# EAGLE board EEZ DIB DCP505 r1B3 (EAGLE 7.2.0), part 1 of 2
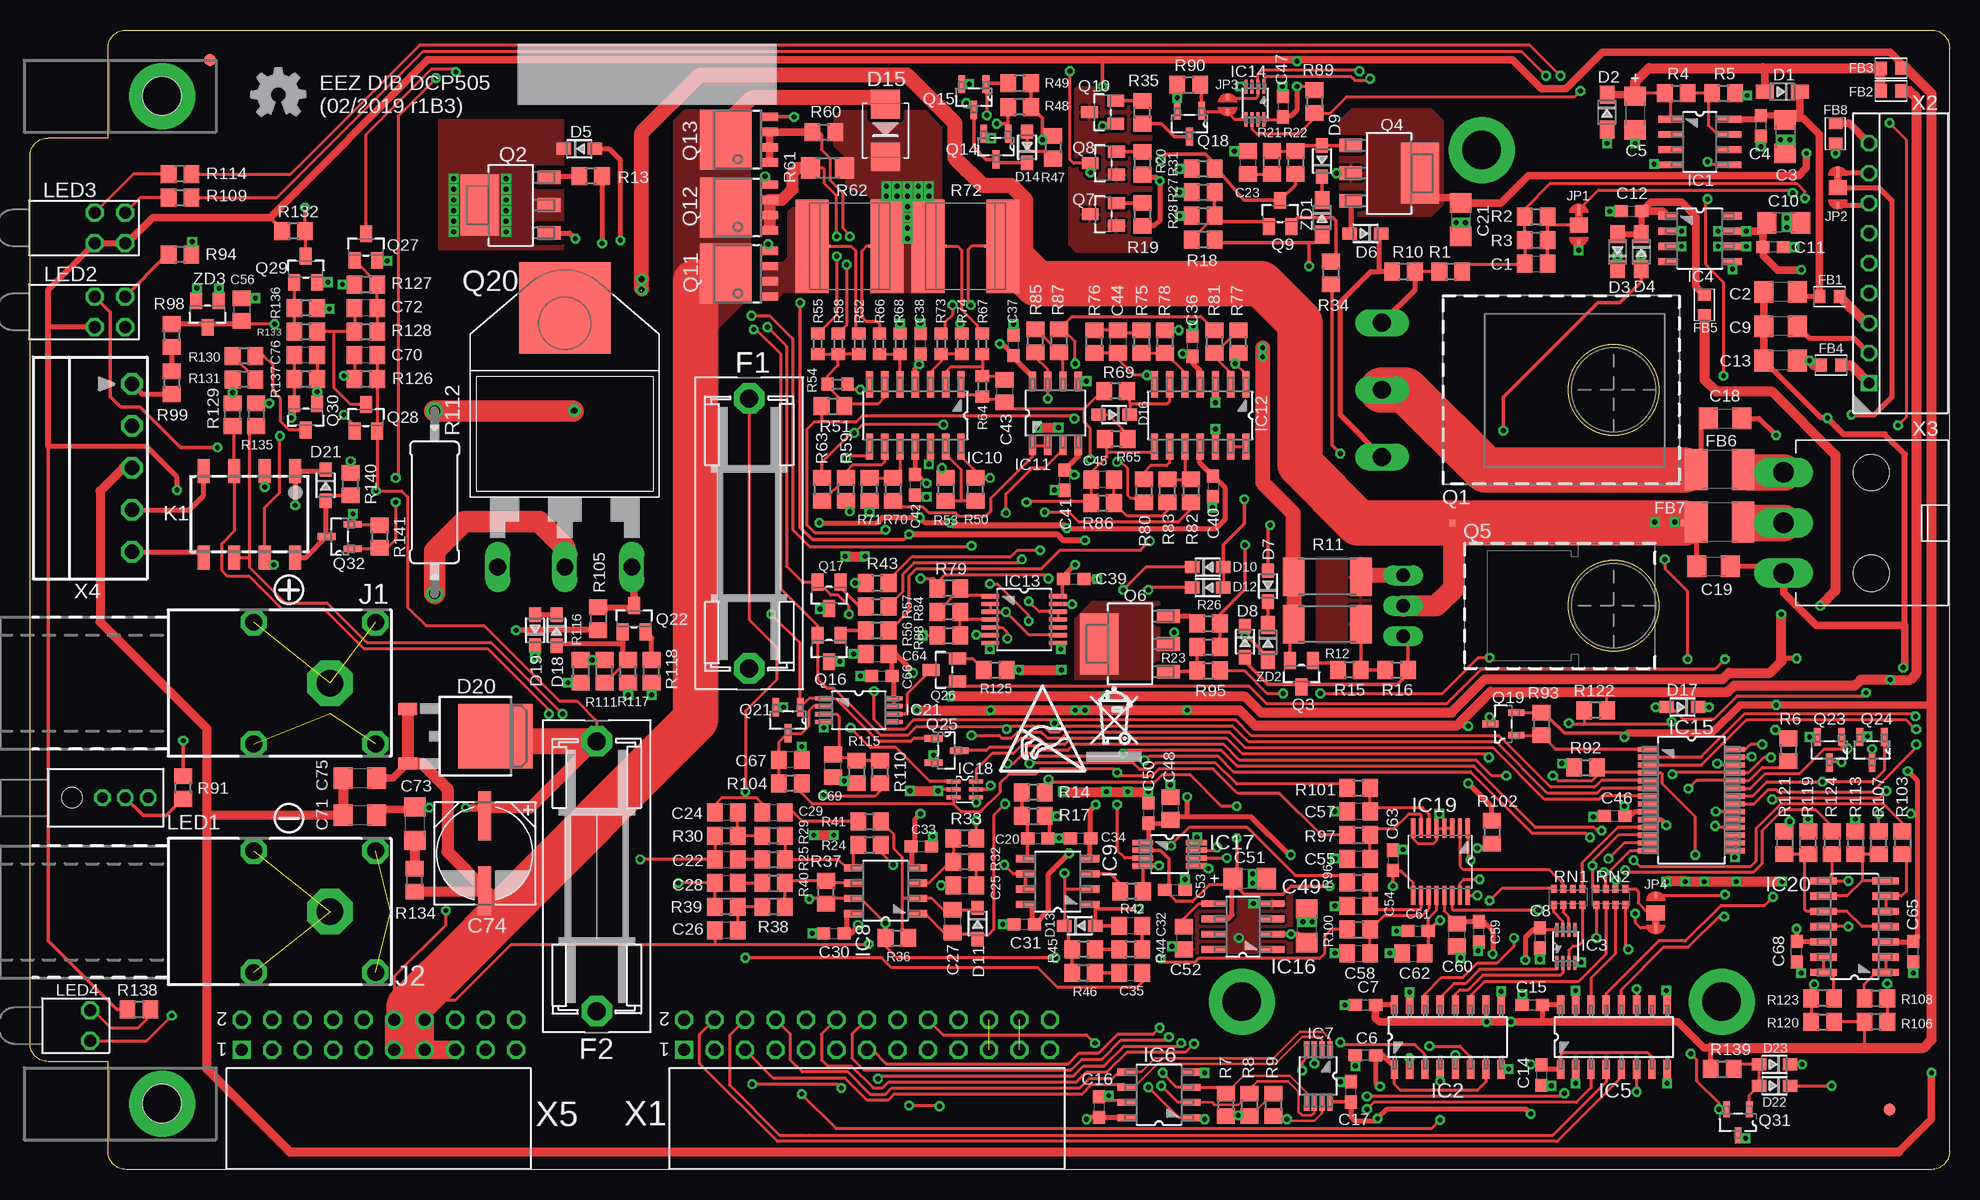
[diagram p0: board, top side]
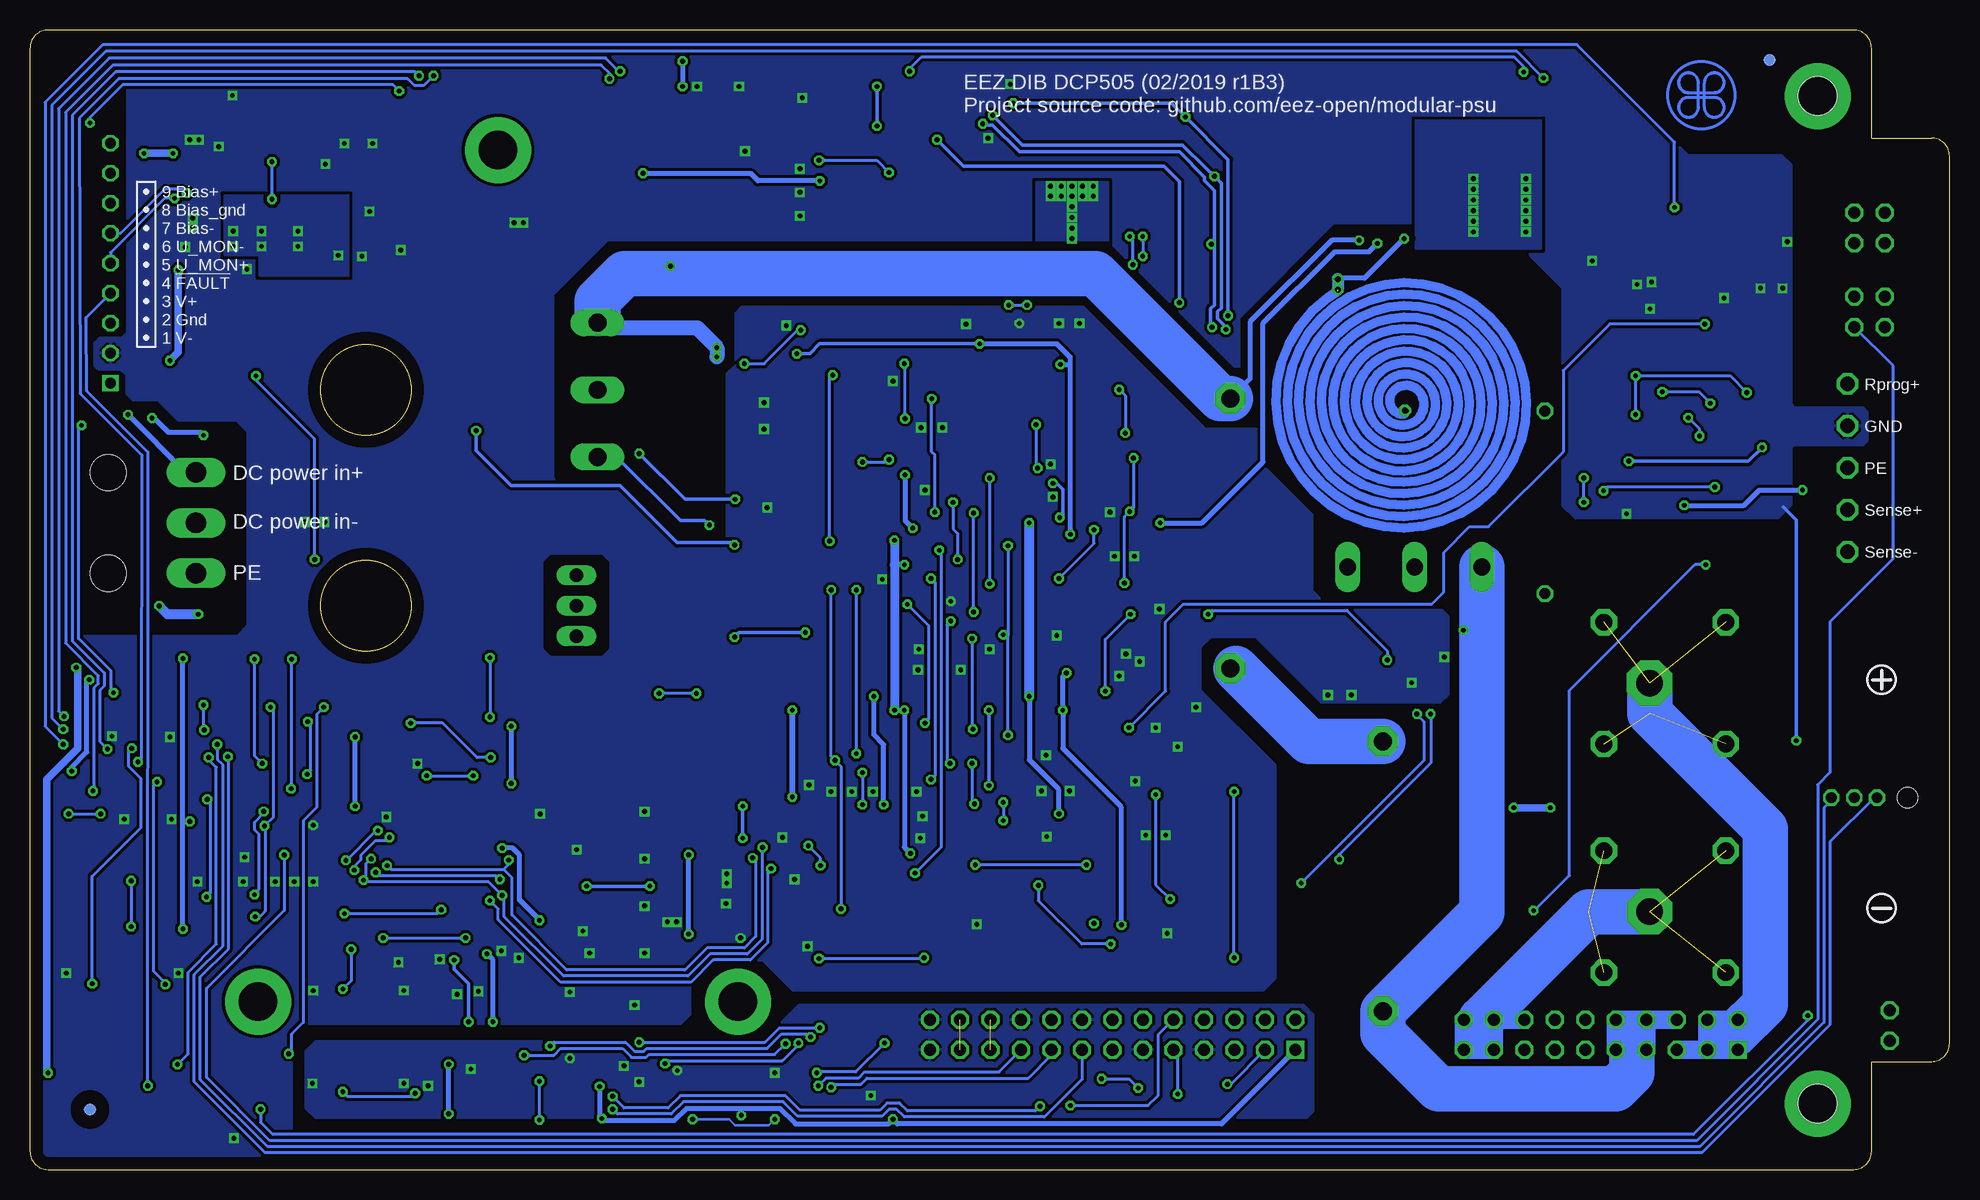
[diagram p1: board, bottom side, seen from below]

Size 160 x 95 mm. Coordinates in mm from the lower left corner, seen from the top.
Outline: 8,95 158.5,95 arc-90 160,93.5 160,1.5 arc-90 158.5,0 8,0 arc-90 6.5,1.5 6.5,9 1.5,9 arc-90 0,10.5 0,84.5 arc-90 1.5,86 6.5,86 6.5,93.5 arc-90 8,95
Outline: circle at 132,47 radius 3.75
Outline: circle at 132,65 radius 3.75
Copper layers (1*16): Top 0.035mm / dielectric 1.5mm / Bottom 0.035mm
Design rules "default *": minimum track width 6mil, minimum drill 0.3mm, track to track 6mil, track to pad 6mil, pad to pad 6mil, via to via 6mil, smd to smd 6mil, copper to edge 40mil, drill to drill 8mil, minimum pad ring 4mil, minimum via ring 8mil, stop-mask expansion 2.5mil, vias tented up to drill 1mm, thermal gap 8mil
Net classes: 0 default: width 0.203 mm, drill 0.3 mm, clearance 0.203 mm; 1 lvds: width 0.152 mm, drill 0.3 mm, clearance 0.152 mm to class 0, clearance 0.152 mm; 2 gnd: width 0.254 mm, drill 0.584 mm, clearance 0.254 mm

## Footprints (pad centres in the part's own frame; a part is rotated, then mirrored left to right if it is on the bottom)
C0805 = smd 1.3 x 1.5: 1 -0.95,0; 2 0.95,0
C1206 = smd 1.6 x 1.8: 1 -1.4,0; 2 1.4,0
C0603 = smd 1.1 x 1: 1 -0.85,0; 2 0.85,0
EC1206 = smd 1.6 x 1.8: + -1.4,0; - 1.4,0
CAPAE830X1050N = smd 4.064 x 1.092: + -3.124,0; - 3.124,0
SOD323-W = smd 1.5 x 1.2: A 1.45,0; C -1.45,0
SOD323-R = smd 1.2 x 1: A 1.3,0; C -1.3,0
SMB = smd 2.4 x 2.4: A 2.2,0; C -2.2,0
TO252-L = smd 1 x 1.6: 1 -2.28,-6.07; 2 2.28,-6.07 | smd 5.4 x 6.2: 3 0,1.23
ZH32 = drill 1.5 pad 2.54 octagon: 1 -11.25,0; 2 11.25,0
BEAD0603 = smd 1 x 1.1: P$1 -0.85,0; P$2 0.85,0
L1812 = smd 1.9 x 3.4: 1 -1.95,0; 2 1.95,0
FIDUCIAL_DUAL = smd 1.016 x 1.016 bottom: B 0,0 | smd 1.016 x 1.016: T 0,0
SOIC127P600X175-8N = smd 1.981 x 0.559: 1 -2.464,1.905; 2 -2.464,0.635; 3 -2.464,-0.635; 4 -2.464,-1.905; 5 2.464,-1.905; 6 2.464,-0.635; 7 2.464,0.635; 8 2.464,1.905
SOIC-16 = smd 1.549 x 0.61: 1 -2.692,4.445; 2 -2.692,3.175; 3 -2.692,1.905; 4 -2.692,0.635; 5 -2.692,-0.635; 6 -2.692,-1.905; 7 -2.692,-3.175; 8 -2.692,-4.445; 9 2.692,-4.445; 10 2.692,-3.175; 11 2.692,-1.905; 12 2.692,-0.635; 13 2.692,0.635; 14 2.692,1.905; 15 2.692,3.175; 16 2.692,4.445
DCU8 = smd 1.168 x 0.254: 1 -1.372,0.75; 2 -1.372,0.25; 3 -1.372,-0.25; 4 -1.372,-0.75; 5 1.372,-0.75; 6 1.372,-0.25; 7 1.372,0.25; 8 1.372,0.75
SOIC127P600X173-8N = smd 1.55 x 0.6: 1 -2.7,1.9; 2 -2.7,0.63; 3 -2.7,-0.64; 4 -2.7,-1.91; 5 2.7,-1.91; 6 2.7,-0.64; 7 2.7,0.63; 8 2.7,1.9
DGK8 = smd 1.422 x 0.432: 1 -2.184,0.965; 2 -2.184,0.33; 3 -2.184,-0.33; 4 -2.184,-0.965; 5 2.184,-0.965; 6 2.184,-0.33; 7 2.184,0.33; 8 2.184,0.965
SOIC127P600X175-14N = smd 2.2 x 0.6: 1 -2.591,3.81; 2 -2.591,2.54; 3 -2.591,1.27; 4 -2.591,0; 5 -2.591,-1.27; 6 -2.591,-2.54; 7 -2.591,-3.81; 8 2.591,-3.81; 9 2.591,-2.54; 10 2.591,-1.27; 11 2.591,0; 12 2.591,1.27; 13 2.591,2.54; 14 2.591,3.81
SOP65P640X120-14N = smd 1.473 x 0.356: 1 -2.819,1.956; 2 -2.819,1.295; 3 -2.819,0.66; 4 -2.819,0; 5 -2.819,-0.66; 6 -2.819,-1.295; 7 -2.819,-1.956; 8 2.819,-1.956; 9 2.819,-1.295; 10 2.819,-0.66; 11 2.819,0; 12 2.819,0.66; 13 2.819,1.295; 14 2.819,1.956
SOP65P780X200-28N = smd 1.651 x 0.432: 1 -3.632,4.216; 2 -3.632,3.581; 3 -3.632,2.921; 4 -3.632,2.286; 5 -3.632,1.626; 6 -3.632,0.965; 7 -3.632,0.33; 8 -3.632,-0.33; 9 -3.632,-0.965; 10 -3.632,-1.626; 11 -3.632,-2.286; 12 -3.632,-2.921; 13 -3.632,-3.581; 14 -3.632,-4.216; 15 3.632,-4.216; 16 3.632,-3.581; 17 3.632,-2.921; 18 3.632,-2.286; 19 3.632,-1.626; 20 3.632,-0.965; 21 3.632,-0.33; 22 3.632,0.33; 23 3.632,0.965; 24 3.632,1.626; 25 3.632,2.286; 26 3.632,2.921; 27 3.632,3.581; 28 3.632,4.216
DGK8-M = smd 1.727 x 0.483: 1 -2.235,0.965; 2 -2.235,0.33; 3 -2.235,-0.33; 4 -2.235,-0.965; 5 2.235,-0.965; 6 2.235,-0.33; 7 2.235,0.33; 8 2.235,0.965
SOT65P210X110-6N = smd 1.168 x 0.356: 1 -0.94,0.66; 2 -0.94,0; 3 -0.94,-0.66; 4 0.94,-0.66; 5 0.94,0; 6 0.94,0.66
PW(R-PDSO-G16) = smd 1.6 x 0.35: 1 -2.8,2.3; 2 -2.8,1.65; 3 -2.8,1; 4 -2.8,0.35; 5 -2.8,-0.3; 6 -2.8,-0.95; 7 -2.8,-1.6; 8 -2.8,-2.25; 9 2.8,-2.25; 10 2.8,-1.6; 11 2.8,-0.95; 12 2.8,-0.3; 13 2.8,0.35; 14 2.8,1; 15 2.8,1.65; 16 2.8,2.3
PW8_TSSOP8 = smd 1.473 x 0.356: 1 -2.921,0.975; 2 -2.921,0.325; 3 -2.921,-0.325; 4 -2.921,-0.975; 5 2.921,-0.975; 6 2.921,-0.325; 7 2.921,0.325; 8 2.921,0.975
S16N-PC = drill 2.2 pad 3.81 octagon: 1 0,0 | drill 1.4 pad 2.184 octagon: NC1 -3.8,5.08; NC2 -3.8,-5.08; NC3 6.36,5.08; NC4 6.36,-5.08
JP3-CUT = smd 1.27 x 1.524: COM 0,0 | smd 0.889 x 0.254: NC -1.27,0 | smd 0.508 x 0.254: NO 1.46,0
JP2-CUT = smd 0.508 x 0.254: 1 -0.635,0; 2 0.635,0
G6K-2F = smd 1 x 2: 1 -3.81,-3.6; 2 -1.27,-3.6; 3 1.27,-3.6; 4 3.81,-3.6; 5 3.81,3.6; 6 1.27,3.6; 7 -1.27,3.6; 8 -3.81,3.6
PCB-MB = hole 3.2: 0,0
L-42WUM-1EGWT = drill 0.9 octagon: CC 4.445,0; GREEN 6.35,0; RED 2.54,0 | hole 1.7: 0,0
L-934EB = drill 1 octagon: BA -1.27,-1.27; BC -1.27,1.27; TA 1.27,-1.27; TC 1.27,1.27
OSG8 = drill 1 octagon: A 0,1.27; C 0,-1.27
TO247BH-CLR2 = drill 1.499 long: 1 -5.588,-19.304; 2 0,-19.304; 3 5.588,-19.304
SOT230P700X180-4N = smd 1.905 x 1.143: 1 -3.2,2.311; 2 -3.2,0; 3 -3.2,-2.311 | smd 3.175 x 5.08: 4 2.565,0
SOT23-BEC = smd 1 x 1.4: B -0.95,-1.1; C 0,1.1; E 0.95,-1.1
TO220H-CLR2 = drill 1.118 long: 1 -2.54,-17.526; 2 0,-17.526; 3 2.54,-17.526
SOT669 = smd 0.7 x 1.4: 1 -1.905,-2.65; 2 -0.635,-2.65; 3 0.635,-2.65; 4 1.905,-2.65 | smd 5 x 4.3: MB 0,1
SOT103P240X110-3N = smd 1.524 x 0.559: 1 -1.079,1.016; 2 -1.079,-1.016; 3 1.079,0
SOT95P237X112-3N = smd 1.321 x 0.559: 1 -1.092,0.94; 2 -1.092,-0.94; 3 1.092,0
TOP3_TRIAC_NOHOLE = drill 1.397 long: A1 -5.588,-20.32; A2 0,-20.32; G 5.588,-20.32 | smd 7.62 x 7.62: NC 0,1.27
R0805 = smd 1.3 x 1.5: 1 -0.95,0; 2 0.95,0
R2512 = smd 1.8 x 3.2: 1 -2.8,0; 2 2.8,0
R0603 = smd 1 x 1.1: 1 -0.85,0; 2 0.85,0
R1206 = smd 1.6 x 1.803: 1 -1.422,0; 2 1.422,0
R_H2728 = smd 2.743 x 7.823: 1 -3.124,0; 2 3.124,0 | smd 0.508 x 0.254: 1S -1.841,0; 2S 1.841,0
0411/15 = drill 0.914 octagon: 1 -7.62,0; 2 7.62,0
CAY16 = smd 0.5 x 0.65: 1 -1.2,-0.675; 2 -0.4,-0.675; 3 0.4,-0.675; 4 1.2,-0.675; 5 1.2,0.675; 6 0.4,0.675; 7 -0.4,0.675; 8 -1.2,0.675
SHORT_NOHOLE = smd 0.5 x 0.25 bottom: P$1 0,0.117; P$2 0,-0.117
SSW-113-02-T-D-RA = drill 1 pad 1.5 square: 1 30.48,2.54 | drill 1 pad 1.5 octagon: 2 30.48,0; 3 27.94,2.54; 4 27.94,0; 5 25.4,2.54; 6 25.4,0; 7 22.86,2.54; 8 22.86,0; 9 20.32,2.54; 10 20.32,0; 11 17.78,2.54; 12 17.78,0; 13 15.24,2.54; 14 15.24,0; 15 12.7,2.54; 16 12.7,0; 17 10.16,2.54; 18 10.16,0; 19 7.62,2.54; 20 7.62,0; 21 5.08,2.54; 22 5.08,0; 23 2.54,2.54; 24 2.54,0; 25 0,2.54; 26 0,0
SPOX_22-05-7095 = drill 0.9 square: 1 -10,0 | drill 0.9 octagon: 2 -7.5,0; 3 -5,0; 4 -2.5,0; 5 0,0; 6 2.5,0; 7 5,0; 8 7.5,0; 9 10,0
MINIFIT_6659-3 = drill 1.7 long: 1 0,-4.2; 2 0,0; 3 0,4.2 | hole 3: -7.3,4.2; -7.3,-4.2
MC1,5/5-G-3,5 = drill 1.2 octagon: 1 -7,0; 2 -3.5,0; 3 0,0; 4 3.5,0; 5 7,0
SSW-110-02-T-D-RA = drill 1 pad 1.5 square: 1 22.86,2.54 | drill 1 pad 1.5 octagon: 2 22.86,0; 3 20.32,2.54; 4 20.32,0; 5 17.78,2.54; 6 17.78,0; 7 15.24,2.54; 8 15.24,0; 9 12.7,2.54; 10 12.7,0; 11 10.16,2.54; 12 10.16,0; 13 7.62,2.54; 14 7.62,0; 15 5.08,2.54; 16 5.08,0; 17 2.54,2.54; 18 2.54,0; 19 0,2.54; 20 0,0
SOT23 = smd 1 x 1.4: 1 -0.95,-1.1; 2 0.95,-1.1; 3 0,1.1

## Placement (x,y rotation side)
C1  47n  [C0805]  125.54,75.5 0 top
C2  47n  [C1206]  145.92,73.15 180 top
C3  10u  [C1206]  146.3,86.11 270 top
C4  100n  [C0603]  144.27,87 270 top
C5  4u7  [EC1206]  133.79,88.07 270 top
C6  100n  [C0603]  111.32,9.53 180 top
C7  100n  [C0603]  111.32,13.72 0 top
C8  100n  [C0603]  125.86,19.3 270 top
C9  47n  [C1206]  145.92,70.29 180 top
C10  10u  [C1206]  146.18,78.93 180 top
C11  100n  [C0603]  145.29,76.9 180 top
C12  100n  [C0603]  133.48,79.88 0 top
C13  47n  [C1206]  145.92,67.44 180 top
C14  100n  [C0603]  125.98,7.87 270 top
C15  100n  [C0603]  125.22,13.72 0 top
C16  100n  [C0603]  89.09,5.21 270 top
C17  100n  [C0603]  110.11,6.48 90 top
C18  47n  [C1206]  141.29,62.61 0 top
C19  47n  [C1206]  140.34,50.29 0 top
C20  100n  [C0603]  84.01,27.62 0 top
C21  1u/100V  [C1206]  119.25,79.18 270 top
C22  47p  [C0805]  58.04,25.84 0 top
C23  10n  [C0805]  101.54,83.95 90 top
C24  2n2  [C0805]  58.04,29.78 180 top
C25  2n2  [C0805]  77.91,23.69 0 top
C26  2n2  [C0805]  58.04,19.94 180 top
C27  220p  [C0805]  76.9,20.7 270 top
C28  47p  [C0805]  58.04,23.88 0 top
C29  2n2  [C0805]  61.98,29.78 0 top
C30  100n  [C0603]  66.99,19.68 0 top
C31  100n  [C0603]  82.87,20.45 0 top
C32  1n  [C0805]  91.76,20.32 180 top
C33  100n  [C0603]  74.3,26.92 180 top
C34  100n  [C0603]  87.57,27.62 0 top
C35  1n  [C0805]  91.76,16.38 180 top
C36  100n  [C0603]  96.9,68.64 90 top
C37  100n  [C0603]  81.98,68.71 90 top
C38  100n  [C0603]  74.23,68.83 90 top
C39  100n  [C0603]  87,49.21 180 top
C40  100n  [C0603]  98.62,56.96 270 top
C41  100n  [C0603]  86.23,57.47 270 top
C42  100n  [C0603]  73.79,57.09 270 top
C43  47n  [C0805]  81.22,64.9 270 top
C44  10n  [C0805]  90.68,69.02 270 top
C45  10n  [C0805]  89.41,57.53 180 top
C46  100n  [C0603]  132.08,29.46 180 top
C47  100n  [C0603]  104.42,88.61 270 top
C48  1u  [C0805]  95.06,30.1 90 top
C49  10u  [C1206]  106.43,20.32 90 top
C50  100n  [C0603]  93.22,29.72 270 top
C51  4u7  [EC1206]  101.66,24.26 0 top
C52  1u  [C0805]  96.2,19.3 270 top
C53  100n  [C0603]  95.44,23.3 180 top
C54  3n3  [C0805]  110.74,21.97 0 top
C55  3n3  [C0805]  110.74,25.91 0 top
C56  10n  [C0805]  17.65,71.69 270 top
C57  3n3  [C0805]  110.74,29.84 180 top
C58  3n3  [C0805]  110.74,18.03 0 top
C59  100n  [C0603]  120.78,19.81 90 top
C60  1u  [C0805]  118.94,19.56 90 top
C61  100n  [C0603]  115.7,19.88 0 top
C62  1u  [C0805]  115.32,18.03 0 top
C63  100n  [C0603]  113.6,25.78 270 top
C64  1u  [C0805]  70.61,42.99 180 top
C65  100n  [C0603]  156.97,18.16 90 top
C66  100n  [C0603]  70.99,41.15 0 top
C67  1n  [C0805]  63.37,34.16 180 top
C68  100n  [C0603]  147.26,18.16 90 top
C69  1n  [C0805]  66.93,33.66 90 top
C70  10n  [C0805]  28,67.88 180 top
C71  10n/200V  [C1206]  27.5,29.53 180 top
C72  2n2  [C0805]  28,71.82 180 top
C73  470n  [C1206]  32.07,28.83 270 top
C74  HHXC630ARA330MHA0G  [CAPAE830X1050N]  37.91,26.35 270 top
C75  10n/200V  [C1206]  27.5,32.64 0 top
C76  10n  [C0805]  22.99,67.88 180 top
D1  1N5819HW-7-F  [SOD323-W]  146.05,89.85 180 top
D2  1N5819HW-7-F  [SOD323-W]  131.44,88.14 270 top
D3  1N5819HW-7-F  [SOD323-W]  132.33,76.52 90 top
D4  1N5819HW-7-F  [SOD323-W]  134.3,76.52 270 top
D5  BAS316  [SOD323-R]  45.78,85.09 0 top
D6  BAS316  [SOD323-R]  111.32,78.04 180 top
D7  BAS316  [SOD323-R]  103.19,48.64 90 top
D8  BAS316  [SOD323-R]  101.28,44.01 270 top
D9  BAS316  [SOD323-R]  107.7,84.07 90 top
D10  BAS316  [SOD323-R]  98.17,50.23 0 top
D11  BAS316  [SOD323-R]  78.99,20.51 270 top
D12  BAS316  [SOD323-R]  98.17,48.51 0 top
D13  BAS316  [SOD323-R]  87.5,20.32 0 top
D14  BAS316  [SOD323-R]  83.12,85.22 90 top
D15  SK55  [SMB]  71.31,86.61 90 top
D16  BAS316  [SOD323-R]  90.36,62.93 180 top
D17  BAS316  [SOD323-R]  137.73,38.54 180 top
D18  BAS316  [SOD323-R]  43.88,44.96 270 top
D19  BAS316  [SOD323-R]  42.1,44.96 90 top
D20  SK10100D1-DIO  [TO252-L]  37.56,36.13 270 top
D21  BAS316  [SOD323-R]  24.64,57.05 270 top
D22  BAS316  [SOD323-R]  145.41,6.99 180 top
D23  BAS316  [SOD323-R]  145.41,8.76 180 top
EEZ_SIGNATURE  SIGNATURESMALL  [SIGNATURE_5MM]  20.68,89.58 180 top
F1  ZH32  [ZH32]  59.94,53.02 270 top
F2  ZH32  [ZH32]  47.24,24.45 270 top
FB1  BLM18AG102SH1D  [BEAD0603]  149.99,72.77 180 top
FB2  BLM18AG102SH1D  [BEAD0603]  155.13,89.92 0 top
FB3  BLM18AG102SH1D  [BEAD0603]  155.13,91.82 0 top
FB4  BLM18AG102SH1D  [BEAD0603]  150.11,67.06 180 top
FB5  BLM18AG102SH1D  [BEAD0603]  139.57,72.07 270 top
FB6  BLM41PG600SN1L  [L1812]  140.84,58.36 180 top
FB7  BLM41PG600SN1L  [L1812]  140.84,53.98 180 top
FB8  BLM18AG102SH1D  [BEAD0603]  150.5,86.36 270 top
FM1  FIDUCIAL_2  [FIDUCIAL_DUAL]  15,92.5 0 top
FM2  FIDUCIAL_2  [FIDUCIAL_DUAL]  155,5 0 top
IC1  LP2951  [SOIC127P600X175-8N]  139.19,85.66 0 top
IC2  SI8641BB-B-IS1  [SOIC-16]  118.17,11.05 90 top
IC3  SN74LVC1G139DCUR  [DCU8]  128.02,18.61 90 top
IC4  MC79L05  [SOIC127P600X173-8N]  139.19,77.6 0 top
IC5  SI8641BB-B-IS1  [SOIC-16]  132.02,11.05 90 top
IC6  AT24C04D-SSHM-T  [SOIC127P600X173-8N]  94.11,6.22 180 top
IC7  TMP1075AIDGK  [DGK8]  107.38,7.81 270 top
IC8  MC33272ADR2G  [SOIC127P600X173-8N]  71.31,23.24 180 top
IC9  MC33274ADR2G  [SOIC127P600X173-8N]  85.66,24 180 top
IC10  OPA4197IDR  [SOIC127P600X175-14N]  73.79,62.87 270 top
IC11  MC33272ADR2G  [SOIC127P600X173-8N]  85.47,63.06 90 top
IC12  MC33274ADR2G  [SOIC127P600X175-14N]  97.54,62.87 270 top
IC13  74HC4066PW  [SOP65P640X120-14N]  82.87,45.85 0 top
IC14  74AUP1G74DC.125  [DCU8]  102.12,88.91 270 top
IC15  MCP23S17-E/SS  [SOP65P780X200-28N]  138.49,30.8 0 top
IC16  REF5025AIDR  [SOIC127P600X175-8N]  101.09,20.26 180 top
IC17  DAC8552IDGKR  [DGK8-M]  95,26.29 0 top
IC18  SN74LVC1G3157DCKR  [SOT65P210X110-6N]  77.91,31.69 0 top
IC19  ADS1120IPWR  [PW(R-PDSO-G16)]  117.54,25.65 270 top
IC20  LM339D  [SOIC127P600X175-14N]  152.08,20.26 180 top
IC21  LM211PWR  [PW8_TSSOP8]  69.09,38.29 0 top
J1  FCR7350R  [S16N-PC]  25,40.55 180 top
J2  FCR7350B  [S16N-PC]  25,21.5 180 top
JP1  JP3-CUT  [JP3-CUT]  129.1,78.74 270 top
JP2  JP3-CUT  [JP3-CUT]  150.69,81.85 270 top
JP3  JP2-CUT  [JP2-CUT]  99.82,88.77 270 top
JP4  JP3-CUT  [JP3-CUT]  135.51,21.4 90 top
K1  G6K-2F-5DC  [G6K-2F]  18.29,54.64 180 top
KK1  PCB-MB  [PCB-MB]  11,89.5 0 top
KK2  PCB-MB  [PCB-MB]  11,5.5 0 top
LED1  L-42WUM/1EGWT  [L-42WUM-1EGWT]  3.5,31 0 top
LED2  L-934EB/2ID  [L-934EB]  6.65,71.5 0 top
LED3  L-934EB/1Y1ID-RV  [L-934EB]  6.65,78.5 0 top
LED4  OSY5LU3E34X-3F1A  [OSG8]  5,12 0 top
Q1  IRFP250MPBF  [TO247BH-CLR2]  132,65 90 bottom
Q2  BCP56-16.115  [SOT230P700X180-4N]  40.07,80.39 180 top
Q3  BC856C  [SOT23-BEC]  105.98,41.34 180 top
Q4  BCP56-16.115  [SOT230P700X180-4N]  113.28,83.06 0 top
Q5  STF10P6F6  [TO220H-CLR2]  132,47 90 bottom
Q6  BCP56-16.115  [SOT230P700X180-4N]  91.69,43.81 180 top
Q7  MMBT5401  [SOT23-BEC]  89.47,79.63 90 top
Q8  MMBT5401  [SOT23-BEC]  89.47,83.88 90 top
Q9  MMBT5551  [SOT23-BEC]  104.2,79.69 0 top
Q10  MMBT5551  [SOT23-BEC]  89.41,88.14 90 top
Q11  PSMN0R9-25YLC  [SOT669]  58.99,74.68 90 top
Q12  PSMN0R9-25YLC  [SOT669]  58.99,80.2 90 top
Q13  PSMN0R9-25YLC  [SOT669]  58.99,85.85 90 top
Q14  2N7002  [SOT103P240X110-3N]  80.52,85.28 270 top
Q15  2N7002  [SOT103P240X110-3N]  78.68,89.41 270 top
Q16  MMBT5401  [SOT23-BEC]  66.61,43.43 180 top
Q17  MMBT5401  [SOT23-BEC]  66.61,47.88 180 top
Q18  2N7002  [SOT103P240X110-3N]  96.65,87.19 270 top
Q19  BSS84P  [SOT95P237X112-3N]  122.81,37.15 180 top
Q20  BTA26-600  [TOP3_TRIAC_NOHOLE]  44.58,70.55 0 top
Q21  2N7002  [SOT103P240X110-3N]  63.18,37.47 270 top
Q22  FMMT493TA  [SOT23-BEC]  50.36,45.91 0 top
Q23  2N7002  [SOT103P240X110-3N]  149.99,34.99 270 top
Q24  2N7002  [SOT103P240X110-3N]  153.54,34.99 270 top
Q25  2N7002  [SOT103P240X110-3N]  76.39,34.92 0 top
Q26  MMBT5551  [SOT23-BEC]  76.2,41.66 90 top
Q27  MMBT5551  [SOT23-BEC]  28,76.9 0 top
Q28  MMBT5401  [SOT23-BEC]  28,62.67 0 top
Q29  MMBT5551  [SOT23-BEC]  22.99,75.06 0 top
Q30  MMBT5551  [SOT23-BEC]  22.99,62.74 180 top
Q31  BSS84P  [SOT95P237X112-3N]  142.37,3.94 270 top
Q32  2N7002  [SOT103P240X110-3N]  25.81,52.77 180 top
R1  100K  [R0805]  118.43,74.87 0 top
R2  5K6  [R0805]  125.54,79.44 0 top
R3  86K6  [R0805]  125.54,77.47 0 top
R4  16K  [R0805]  137.22,89.73 0 top
R5  5K1  [R0805]  141.16,89.73 0 top
R6  10K  [R0805]  146.56,34.99 270 top
R7  10K  [R0805]  99.69,5.4 90 top
R8  10K  [R0805]  101.66,5.4 90 top
R9  10K  [R0805]  103.63,5.4 270 top
R10  1K  [R0805]  114.49,74.87 0 top
R11  3R9/2W  [R2512]  108.14,49.41 180 top
R12  3R9/2W  [R2512]  108.14,45.47 180 top
R13  750R  [R0805]  46.74,82.8 180 top
R14  10K  [R0805]  83.63,31.43 180 top
R15  2K2  [R0805]  109.98,41.66 180 top
R16  2K2  [R0805]  113.92,41.66 0 top
R17  220R  [R0805]  83.63,29.46 0 top
R18  16K  [R0805]  97.79,77.53 0 top
R19  220R  [R0805]  92.71,79.63 270 top
R20  220R  [R0805]  92.71,83.88 270 top
R21  470R  [R0805]  103.5,83.95 90 top
R22  100R  [R0805]  105.47,83.95 270 top
R23  1K  [R0805]  98.23,43.56 0 top
R24  7K5 0.1%  [R0805]  69.98,27.05 180 top
R25  10K  [R0805]  61.98,25.84 0 top
R26  220R  [R0805]  98.23,45.53 0 top
R27  2K2  [R0805]  97.79,81.47 0 top
R28  750R  [R0805]  97.79,79.5 0 top
R29  130K 0.1%  [R0805]  61.98,27.81 180 top
R30  24K 0.1%  [R0805]  58.04,27.81 180 top
R31  51K  [R0805]  97.79,83.44 0 top
R32  220R  [R0805]  77.91,25.65 180 top
R33  10K  [R0805]  77.91,27.62 180 top
R34  470R  [R0805]  108.46,74.74 90 top
R35  1K8  [R0805]  92.71,88.14 90 top
R36  10K  [R0805]  72.26,19.3 0 top
R37  7K5 0.1%  [R0805]  66.36,23.11 90 top
R38  130K 0.1%  [R0805]  61.98,21.91 180 top
R39  24K 0.1%  [R0805]  58.04,21.91 180 top
R40  10K  [R0805]  61.98,23.88 0 top
R41  220R  [R0805]  69.98,29.02 0 top
R42  2K2  [R0805]  91.82,23.18 180 top
R43  10K  [R0805]  70.61,48.9 0 top
R44  1K  [R0805]  91.76,18.35 180 top
R45  10K  [R0805]  87.82,18.35 180 top
R46  10K  [R0805]  87.82,16.38 180 top
R47  1K  [R0805]  85.28,85.22 270 top
R48  1K  [R0805]  82.49,88.58 180 top
R49  1K  [R0805]  82.49,90.55 180 top
R50  30K  [R0805]  78.8,56.71 90 top
R51  7M5  [R0805]  66.93,63.63 0 top
R52  3K 0.1%  [R0603]  69.09,68.83 270 top
R53  10K  [R0805]  76.33,56.71 270 top
R54  40K2 0.1%  [R0603]  67.31,65.47 0 top
R55  3K 0.1%  [R0603]  65.66,68.83 270 top
R56  2K2  [R0805]  70.61,44.96 0 top
R57  2K2  [R0805]  70.61,46.93 0 top
R58  3K 0.1%  [R0603]  67.37,68.83 270 top
R59  10K  [R0805]  68.01,56.71 270 top
R60  1R  [R0805]  66.17,86.49 0 top
R61  0R1  [R1206]  66.48,83.5 180 top
R62  0R010  [R_H2728]  68.33,76.96 180 top
R63  10K  [R0805]  66.04,56.71 270 top
R64  499K 0.1%  [R0603]  79.38,65.28 90 top
R65  1K  [R0805]  90.55,60.9 180 top
R66  1K 0.1%  [R0603]  70.8,68.83 270 top
R67  1K 0.1%  [R0603]  79.38,68.83 90 top
R68  40K2 0.1%  [R0603]  72.52,68.83 270 top
R69  10K  [R0805]  90.49,64.9 180 top
R70  10K  [R0805]  71.95,56.71 270 top
R71  10K  [R0805]  69.98,56.71 90 top
R72  0R010  [R_H2728]  77.98,76.96 180 top
R73  1K 0.1%  [R0603]  75.95,68.83 90 top
R74  499K 0.1%  [R0603]  77.66,68.83 90 top
R75  10K  [R0805]  92.65,69.02 270 top
R76  1M  [R0805]  88.71,69.02 90 top
R77  1K  [R0805]  100.71,69.02 90 top
R78  100R  [R0805]  94.61,69.02 90 top
R79  1K  [R0805]  76.58,48.45 180 top
R80  10K  [R0805]  92.84,56.58 270 top
R81  10K  [R0805]  98.74,69.02 90 top
R82  100R  [R0805]  96.77,56.58 270 top
R83  10K  [R0805]  94.81,56.58 90 top
R84  1K  [R0805]  76.58,46.48 180 top
R85  10K  [R0805]  83.82,69.09 90 top
R86  1M  [R0805]  89.41,55.56 0 top
R87  10K  [R0805]  85.79,69.09 90 top
R88  1K  [R0805]  76.58,44.51 0 top
R89  10K  [R0805]  107.06,89.03 270 top
R90  100K  [R0805]  96.58,90.42 0 top
R91  270R  [R0805]  12.76,31.84 90 top
R92  47K  [R0805]  129.67,33.53 0 top
R93  100K  [R0805]  125.98,37.15 270 top
R94  470R  [R0805]  12.51,76.26 180 top
R95  10K  [R0805]  98.23,41.59 0 top
R96  220R  [R0805]  110.74,23.94 0 top
R97  220R  [R0805]  110.74,27.88 0 top
R98  470R  [R0805]  11.81,69.53 270 top
R99  470R  [R0805]  11.81,65.6 270 top
R100  220R  [R0805]  110.74,20 0 top
R101  220R  [R0805]  110.74,31.81 0 top
R102  10R  [R0805]  121.86,28.13 270 top
R103  10K  [R0805]  156.08,27.24 270 top
R104  10K  [R0805]  63.37,32.19 180 top
R105  470R  [R0805]  47.37,45.91 270 top
R106  5K1  [R0805]  153.86,12.32 180 top
R107  47K  [R0805]  154.11,27.24 90 top
R108  5K6  [R0805]  153.86,14.29 0 top
R109  330R  [R0805]  12.51,81.03 0 top
R110  750R  [R0805]  70.87,33.15 90 top
R111  1K  [R0805]  47.88,41.53 90 top
R112  AC01000001007JA100  [0411/15]  33.72,55.63 270 top
R113  2K2  [R0805]  152.15,27.24 270 top
R114  330R  [R0805]  12.51,82.99 180 top
R115  10K  [R0805]  68.9,33.15 270 top
R116  10K  [R0805]  45.91,41.53 270 top
R117  100K  [R0805]  49.85,41.53 90 top
R118  6R2  [R0805]  51.82,41.53 90 top
R119  10K  [R0805]  148.21,27.24 90 top
R120  5K1  [R0805]  149.42,12.32 0 top
R121  10K  [R0805]  146.24,27.24 270 top
R122  4K7  [R0805]  130.49,38.29 180 top
R123  5K6  [R0805]  149.42,14.29 180 top
R124  10K  [R0805]  150.18,27.24 270 top
R125  1K  [R0805]  80.45,41.66 0 top
R126  330R  [R0805]  28,65.91 0 top
R127  47K  [R0805]  28,73.79 0 top
R128  47K  [R0805]  28,69.85 0 top
R129  750R  [R0805]  16.89,62.93 90 top
R130  1K  [R0805]  17.84,67.82 180 top
R131  2K2  [R0805]  17.84,65.85 180 top
R132  10K  [R0805]  21.97,78.23 180 top
R133  10K  [R0805]  22.99,69.85 0 top
R134  1R  [R0805]  32.07,24.13 90 top
R135  750R  [R0805]  18.86,62.93 270 top
R136  47K  [R0805]  22.99,71.82 180 top
R137  330R  [R0805]  22.99,65.91 0 top
R138  470R  [R0805]  9.08,13.34 180 top
R139  10K  [R0805]  141.03,8.38 0 top
R140  470R  [R0805]  26.73,57.15 90 top
R141  100K  [R0805]  29.15,52.77 270 top
RN1  DR1206-33R-4/8  [CAY16]  128.21,22.73 0 top
RN2  DR1206-33R-4/8  [CAY16]  131.76,22.73 0 top
SH1  [SHORT_NOHOLE]  118.55,53.91 90 bottom
SH2  [SHORT_NOHOLE]  137.79,53.91 90 bottom
U$1  [RECYCLE_BIN1/8]  88.08,34.04 0 top
U$6  [ESD_SYMBOL]  80.86,33.23 0 top
X1  ZL263-26DG  [SSW-113-02-T-D-RA]  85,12.5 180 top
X2  22-05-7085  [SPOX_22-05-7095]  153.29,75.56 90 top
X3  39-30-3035  [MINIFIT_6659-3]  146.18,53.91 180 top
X4  1844249  [MC1,5/5-G-3,5]  8.5,58.5 270 top
X5  ZL263-20DG  [SSW-110-02-T-D-RA]  40.5,12.5 180 top
ZD1  BZX384-C15  [SOD323-W]  107.7,79.38 270 top
ZD2  PDZ6.2B  [SOD323-W]  103.19,43.94 270 top
ZD3  SLVU2.8-TP  [SOT23]  14.8,71.31 180 top

## Library data of the parts
C1-C4 C6-C50 C52-C73 C75 C76 FB6 FB7 R1-R61 R63-R71 R73-R141 = rcl
C5 C51 C74 D5-D23 EEZ_SIGNATURE F1 F2 FM1 FM2 IC1 IC2 IC4-IC9 IC11 IC13 IC14 IC16-IC21 J1 J2 JP1-JP4 KK1 KK2 LED1-LED4 Q1 Q2 Q4-Q6 Q11-Q13 Q20 R62 R72 RN1 RN2 SH1 SH2 ZD1-ZD3 = EEZ_Lib1
D1-D4 = diode
FB1-FB5 FB8 = EEZ_inductors_and_transformers
IC3 = EEZ_DIB
IC10 IC12 = EEZ_Lib1; MPN: TL074ACD; OC_FARNELL: 9593349; OC_NEWARK: 52F2748; PACKAGE: SOIC-14; SUPPLIER: Texas Instruments
IC15 = EEZ_Lib1; FARNELL: 1467675; TME: MCP23S17-E/SS
K1 = relay; MF: OMRON COMPONENTS USA; MPN: G6K-2F DC24; OC_FARNELL: 1690427; OC_NEWARK: 36K7467
Q3 Q7-Q10 Q16 Q17 Q22 Q26-Q30 = transistor
Q14 Q15 Q18 Q21 Q23-Q25 Q32 = EEZ_Lib1; MPN: 2N7002-7-F; OC_FARNELL: 1713823; OC_NEWARK: 25R5679; PACKAGE: SOT-23-3; SUPPLIER: DIODES INC.
Q19 Q31 = EEZ_Lib1; MPN: IRLML2246TRPBF; OC_FARNELL: 1888166; OC_NEWARK: 40T7450; PACKAGE: SOT-3; SUPPLIER: International Rectifier; TME: IRLML2246TRPBF
U$1 U$6 = olimex_logo1
X1 = EEZ_connectors; FARNELL: 1805583; TME: ZL263-26DG
X2 X4 X5 = EEZ_connectors
X3 = EEZ_connectors; FARNELL: 9963545

## Nets
!DP_DRIVE: Q6.1 R23.1 R95.1
!DRDY: IC19.14 JP4.NC
!FAULT: D22.C X2.4
!FAULT_OUT: D17.A IC14.6 LED4.C Q31.2 R89.2
!OVP_EN: IC15.26 Q26.B
!OVP_FAULT: D23.C IC15.25 Q25.3 R122.2
!RESET: D17.C IC5.12 IC15.18
!SET_DP: IC15.1 Q19.1 R93.2
+3V3: C6.1 C14.1 C16.2 C17.1 IC2.1 IC2.7 IC5.1 IC5.7 IC6.8 IC7.8 R7.1 R8.1 R9.1 X1.1
+5V: C7.2 C8.1 C15.2 C46.1 C47.2 C59.2 C60.2 D21.C FB3.P$2 IC2.10 IC2.16 IC3.8 IC5.10 IC5.16 IC14.7 IC14.8 IC15.9 IC19.13 K1.1 LED2.BA LED3.BA LED3.TA Q10.B Q19.2 R6.1 R89.1 R93.1 R106.2 R120.2 R132.2 R138.2 R139.1
+5VOUT: C5.+ D1.A D2.C FB2.P$1 FB3.P$1 IC1.1 R4.1
+6V: C2.1 C3.1 C4.1 D1.C FB1.P$2 IC1.8
+VAUX: X1.2
+VREF: C51.+ C53.2 C63.2 IC16.6 IC17.2 IC19.9 R14.1 R51.1 R79.2 R81.2 R87.2
-5VOUT: C12.2 D3.A D4.C FB5.P$1 IC4.1
-9V: C10.2 C11.2 C13.1 D4.A FB4.P$2 IC4.2 IC4.3 IC4.6 IC4.7 R23.2 R26.2
AUX_IN: C56.2 IC18.1 R98.1 ZD3.3
AUX_USET_SW: IC15.4 IC18.6 LED2.TA R92.2
BIAS_IN+: FB8.P$1 X2.9
CC_ACTIVE: IC15.22 Q24.1 R120.1 R123.2
CC_LED: LED3.BC R114.2
CCS_HS: D5.C Q2.2 Q2.4
CS_ADC: IC19.2 RN1.7
CS_DAC: IC17.5 RN1.8
CS_IOEXP: IC15.11 RN1.5
CSA: IC2.13 IC3.1
CSB: IC2.12 IC3.2
CURR_5A: IC13.13 IC15.5 Q11.4 Q14.1 Q17.E R48.2
CURR_50MA: D14.C IC13.6 IC15.7 Q13.4 Q14.3 Q15.3
CURR_500MA: IC13.5 IC15.6 Q12.4 Q15.1 Q16.E R49.2
CV_ACTIVE: IC15.23 Q23.1 R106.1 R108.2
CV_LED: LED3.TC R109.1
DC_BIAS: C21.1 FB8.P$2 Q4.2 Q4.4 R19.2 R20.2
DIB_5V: X1.23 X1.24
DIB_12V: X1.21 X1.22
DIB_A0: IC6.1 IC7.7 R9.2 X1.17
DIB_A1: IC6.2 IC7.6 R8.2 X1.19
DIB_A2: IC6.3 IC7.5 R7.2 X1.18
DIB_CSA: IC2.4 X1.9
DIB_CSB: IC2.5 X1.12
DIB_IRQ: IC5.6 X1.10
DIB_MISO: IC2.6 X1.14
DIB_MOSI: IC5.3 X1.15
DIB_NFAULT: IC7.3 X1.3
DIB_NRESET: IC5.5 X1.4
DIB_SCL: IC6.6 IC7.2 X1.5
DIB_SCLK: IC2.3 X1.13
DIB_SDA: IC6.5 IC7.1 X1.8
DP_LED: Q19.3 R95.2
DP_S: Q5.3 R11.1 R12.1 R15.1 R16.1
GCOM: IC9.6 IC9.7 R24.1
GND: C3.2 C4.2 C5.- C7.1 C8.2 C9.1 C10.1 C11.1 C12.1 C15.1 C20.2 C21.2 C23.2 C30.1 C31.1 C33.1 C34.1 C36.2 C37.2 C38.2 C39.1 C40.2 C41.2 C42.2 C46.2 C47.1 C48.2 C49.2 C50.1 C51.- C52.2 C53.1 C54.1 C55.1 C56.1 C57.2 C58.1 C59.1 C60.1 C61.1 C62.1 C63.1 C64.2 C65.1 C66.1 C67.1 C68.1 C69.1 D2.A D3.C D19.C IC1.4 IC2.9 IC2.15 IC3.4 IC4.5 IC5.9 IC5.15 IC10.12 IC11.5 IC12.3 IC12.12 IC13.7 IC13.8 IC13.11 IC13.12 IC14.4 IC15.10 IC15.15 IC15.16 IC15.17 IC16.4 IC17.8 IC18.2 IC19.3 IC19.4 IC19.5 IC19.8 IC21.4 JP1.NO Q14.2 Q15.2 Q16.C Q17.C Q18.2 Q21.2 Q23.2 Q24.2 Q25.2 Q27.E Q29.E Q31.3 Q32.2 R5.2 R17.2 R27.1 R28.1 R31.1 R68.1 R71.1 R74.2 R88.1 R90.1 R91.2 R92.1 R94.1 R113.1 R115.2 R116.2 R117.1 R118.1 R119.2 R125.2 R127.1 R136.1 R141.1 SH2.P$2 X2.2 X4.2 ZD3.1 ZD3.2
GNDIO: C6.2 C14.2 C16.1 C17.2 IC2.2 IC2.8 IC5.2 IC5.8 IC6.4 IC6.7 IC7.4 X1.7 X1.11 X1.16 X1.20 X1.25 X1.26
I_CTRL: IC10.8 R43.1 R59.2
I_MON: IC10.14 R50.2 R101.1
I_SERVO: C32.2 D12.C D13.A IC9.1 R124.1
I_SET: IC17.4 R42.1 R96.1
IRQ: JP4.COM RN2.5
ISENSE+: IC10.6 R51.2 R52.2 R54.1 R55.2 R58.2
ISENSE-: IC10.5 R66.2 R68.2
LOOP_CTRL: D10.A D12.A R34.1
MISO: IC15.14 IC19.15 RN2.7
MOSI: IC15.13 IC17.7 IC19.16 RN2.6
N$1: R67.2 R72.2S
N$2: FB1.P$1 X2.3
N$3: IC15.20 JP4.NO
N$4: C70.1 C71.1 C73.1 C74.+ D20.3 F1.2 F2.1 K1.2 Q28.E R126.2
N$5: FB4.P$1 X2.1
N$6: IC3.7 RN1.1
N$7: D15.C R60.2 R61.1 R62.1 R72.2
N$8: IC11.1 IC11.2 R70.2
N$9: IC2.11 RN2.2
N$10: IC5.11 RN2.4
N$11: FB7.1 X3.2
N$12: LED1.CC R91.1
N$13: C1.2 JP1.COM R2.2 R3.2
N$14: D22.A D23.A Q31.1 R139.2
N$15: Q20.A2 R112.2
N$16: C1.1 R1.2 R2.1 R3.1 X2.5
N$17: R98.2 R99.1
N$18: Q20.G Q22.C R105.1
N$19: Q22.E R118.2
N$20: D18.C D19.A
N$21: D18.A Q22.B R111.1 R117.2
N$22: IC3.6 RN1.2
N$23: IC11.6 R85.2 R87.1
N$24: IC21.6 Q26.C
N$25: LED4.A R138.1
N$26: IC3.3 RN1.4
N$27: JP1.NC X2.6
N$28: C43.1 IC10.2 R64.2 R67.1
N$29: Q11.1 Q11.2 Q11.3 R62.2
N$30: Q26.E R125.1
N$31: C67.2 IC21.2 Q21.3 R104.2
N$32: R99.2 X4.1
N$33: C69.2 IC21.3 R110.2 R115.1
N$34: D14.A R47.2
N$35: C43.2 IC10.1 R64.1 R69.2 R80.2
N$36: IC11.3 IC13.2 IC13.3 IC13.9
N$37: C44.2 IC12.7 R56.2 R76.1
N$38: Q16.B R56.1
N$39: Q17.B R57.1
N$40: IC10.7 R53.1 R54.2 R63.1
N$41: IC10.9 R59.1 R63.2
N$42: IC13.1 R79.1 R84.2
N$43: C45.2 IC12.8 R57.2 R65.2 R86.1
N$44: IC10.10 R70.1 R71.2
N$45: IC14.5 JP3.2 Q18.1 R90.2
N$46: Q24.3 R114.1
N$47: IC13.4 R84.1 R88.2
N$48: IC11.7 R82.2 R85.1
N$49: IC10.13 R50.1 R53.2
N$50: R72.1S R73.2
N$51: R62.1S R66.1
N$52: IC12.2 R77.2 R81.1
N$53: IC12.1 R77.1 R78.2
N$54: IC10.3 R73.1 R74.1
N$55: IC12.13 IC12.14
N$56: Q12.1 Q12.2 Q12.3 R55.1 R61.2
N$57: D16.C IC12.6 R69.1
N$58: IC12.5 R75.2 R78.1
N$59: R52.1 R62.2S
N$60: IC12.9 R80.1
N$61: IC5.14 RN2.3
N$62: IC12.10 R82.1 R83.2
N$63: Q13.1 Q13.2 Q13.3 R58.1 R60.1
N$64: JP2.NO X2.7
N$65: C44.1 R75.1 R76.2
N$66: JP2.NC X2.8
N$67: C45.1 R83.1 R86.2
N$70: C61.2 C62.2 IC19.12 R102.2
N$71: C52.1 IC16.5
N$72: C54.2 IC19.10 R96.2
N$73: C58.2 IC19.11 R100.2
N$74: D16.A R65.1
N$80: C55.2 IC19.7 R97.2
N$81: C57.1 IC19.6 R101.2
N$82: IC9.3 R42.2
N$83: IC8.3 R32.2 R33.2
N$84: C27.1 D11.C IC8.2 R36.2 R41.2
N$85: C26.1 R38.2 R39.1
N$86: C22.2 R25.1
N$87: C28.2 R40.1
N$88: C35.2 R46.1
N$89: D13.C IC9.2 R43.2 R45.2 R46.2
N$90: C25.2 R32.1
N$91: C29.2 R41.1
N$92: D6.C D7.A Q1.1 R10.1
N$93: D6.A Q4.3
N$95: D9.A Q4.1 R21.2 R22.1
N$96: C23.1 R21.1
N$97: Q9.B R18.1 R27.2 R28.2
N$98: Q6.3 R26.1
N$99: Q3.B R15.2
N$101: IC1.7 R4.2 R5.1
N$102: C20.1 IC9.5 R14.2 R17.1
N$105: IC20.1 IC20.2 R108.1
N$106: IC20.13 IC20.14 R123.1
N$107: C70.2 Q28.B R126.1 R129.2 R131.2
N$108: C72.2 Q28.C R128.1 R133.2
N$109: Q30.C R130.1
N$110: C76.1 Q30.B R135.1 R137.2
N$111: C72.1 Q27.B R127.2 R128.2
N$112: Q29.B R133.1 R136.2
N$113: C73.2 R134.2
N$114: D21.A K1.8 Q32.3 R140.1
N$115: K1.4 X4.4
N$116: K1.5 X4.5
N$117: C24.1 R29.2 R30.1
N$118: Q23.3 R109.2
N$120: LED2.BC R140.2
N$121: LED2.TC R94.2
N$122: IC2.14 RN2.1
N$129: D9.C ZD1.C
N$143: D7.C ZD2.C
N$145: Q9.E R34.2
N$147: D8.A Q3.C Q5.1 R16.2
N$150: IC8.5 R24.2 R25.2 R29.1
N$153: IC20.5 IC20.6 R103.2
N$158: IC8.6 R37.2 R38.1 R40.2
N$160: R44.2 R45.1
N$161: IC20.8 IC20.11 R124.2
N$162: C32.1 R44.1
N$166: Q2.3 R13.2
N$170: IC20.7 IC20.9 R107.1 R113.2
N$173: R130.2 R131.1
N$177: IC20.4 IC20.10 R119.1 R121.2
N$183: Q8.E R20.1
N$184: Q7.E R19.1
N$186: Q10.E R35.2
OE_GREEN: IC15.27 LED1.GREEN
OE_RED: IC15.28 LED1.RED
OE_SYNC: IC5.4 X1.6
OE_TRIG: IC5.13 IC14.1
OUTC+: J1.1 J1.NC1 J1.NC2 J1.NC3 J1.NC4 X5.1 X5.2 X5.3 X5.4 X5.5
OUTC-: J2.1 J2.NC1 J2.NC2 J2.NC3 J2.NC4 X5.16 X5.17 X5.18 X5.19 X5.20
OUTF+: F2.2 Q20.A1 R105.2 X5.6 X5.7 X5.8 X5.9 X5.10
OVP_FAULT: IC21.1 Q21.1 Q25.1 R111.2 R116.1
PE: C2.2 C9.2 C13.2 C18.2 C19.2 C71.2 C75.1 X3.3 X4.3
POST_OE: Q18.3 R35.1
POST_OUT+: C24.2 C29.1 C35.1 D5.A F1.1 Q1.3 Q3.E R1.1 R10.2 R11.2 R12.2 R18.2 ZD1.A
POST_OUT-: C25.1 C26.2 C74.- C75.2 C76.2 D15.A D20.1 D20.2 K1.7 Q11.MB Q12.MB Q13.MB Q30.E R134.1 R137.1 X5.11 X5.12 X5.13 X5.14 X5.15
PRE_OE: IC14.2 IC15.2 JP3.1
PREG_IN+: FB6.1 JP2.COM X3.1
PREG_IN-: C19.1 FB7.2 Q5.2 SH1.P$1 SH2.P$1
PREG_OUT+: C18.1 FB6.2 Q1.2
PREG_OUT-: Q2.1 R72.1 R112.1 SH1.P$2
PWRGOOD: IC1.5 IC15.24 R6.2
Q6C: D8.C Q6.2 Q6.4 ZD2.A
Q7C: Q7.B Q7.C Q8.B Q10.C
RSENSE: IC15.3 Q32.1 R141.2
SCLK: IC15.12 IC17.6 IC19.1 RN2.8
SENSE+: C22.1 K1.3 R30.2 R129.1
SENSE-: C28.1 K1.6 R39.2 R135.2
SENSE_ERR: IC15.21 Q29.C R132.1
SENSE_PROT: Q8.C Q9.C Q27.C R22.2 R31.2
U_MON: IC8.7 R36.1 R37.1 R100.1 R110.1
U_SERVO: C27.2 D10.C D11.A IC8.1 R103.1
U_SET: IC17.3 IC18.3 R97.1 R104.1
U_SET_OUT: IC18.4 R33.1
V+: C30.2 C31.2 C36.1 C37.1 C38.1 C39.2 C48.1 C49.1 C50.2 C64.1 C65.2 C66.2 FB2.P$2 IC8.8 IC9.8 IC10.4 IC11.8 IC12.4 IC13.14 IC16.2 IC17.1 IC18.5 IC20.3 IC21.7 IC21.8 R47.1 R48.1 R49.1 R102.1 R107.2 R122.1
V-: C33.2 C34.2 C40.1 C41.1 C42.1 C68.2 FB5.P$2 IC8.4 IC9.4 IC10.11 IC11.4 IC12.11 IC20.12 R13.1 R121.1

## Tracks (layer width: path | path; a pad name or v marks a point on that pad's centre or on a via)
!DP_DRIVE
  Top 0.305: 96.84,43.56 R23.1 R95.1 97.2,41.5 Q6.1
  Top 0.406: 96.93,41.95 R95.1
!DRDY  (via drill 0.4)
  Top 0.254: IC19.14 118.54,21.73 118.62,21.65 v125.73,21.65 | v133.79,21.34 133.79,20.57 134.24,20.13 JP4.NC
  Bottom 0.254: v133.79,21.34 126.05,21.34 v125.73,21.65
!FAULT  (via drill 0.4)
  Top 0.254: D22.C v150.18,6.99
  Bottom 0.254: v150.18,6.99 150.24,7.05 150.18,59.82 155.26,64.9 155.32,71.03 X2.4
!FAULT_OUT  (via drill 0.4)
  Top 0.254: 141.43,4.65 Q31.2 140.79,5.03 | 140.79,5.03 v140.78,5.02 | 140.79,5.03 140.79,5.51 138.94,7.37 138.94,9.14 v138.43,9.65 | v129.22,89.92 128.71,89.41 109.73,89.41 108.4,88.08 R89.2 107.06,87.63 105.73,86.3 102.3,86.3 101.87,86.72 IC14.6 | v155,87.25 156.4,85.85 156.4,62.74 v155.7,62.04 | v153.03,39.75 152.78,39.5 142.3,39.5 140.34,37.53 137.79,37.53 136.78,38.54 D17.A v135.51,38.54 | LED4.C 9.71,10.73 v11.81,12.83
  Bottom 0.254: v11.81,12.83 11.81,12.45 21.34,2.92 139.76,2.92 140.78,3.94 v140.78,5.02 | v138.43,9.65 138.18,9.91 138.18,11.3 137.22,12.26 137.22,29.08 136.08,30.23 136.08,37.97 v135.51,38.54 | v129.22,89.92 129.73,90.42 152.27,90.42 155,87.69 v155,87.25 | v153.03,39.75 153.29,40.01 153.29,41.59 155.96,44.26 155.96,61.78 v155.7,62.04
!OVP_EN  (via drill 0.4)
  Top 0.254: IC15.26 140.78,33.72 v140.65,33.85 | v141.29,42.55 140.46,41.72 120.97,41.72 118.11,38.86 103.06,38.86 101.66,40.26 77.75,40.26 Q26.B
  Bottom 0.254: v141.29,42.55 141.29,34.48 v140.65,33.85
!OVP_FAULT  (via drill 0.4)
  Top 0.254: v136.91,32.96 137.03,33.08 IC15.25 143.26,33.08 144.53,34.35 v145.1,34.35 | v121.6,34.35 121.28,34.67 101.03,34.67 99.76,35.94 86.74,35.94 86.23,35.43 84.64,35.43 84.14,35.94 82.55,35.94 81.79,35.18 79.95,35.18 79.69,34.92 Q25.3 | 129.48,37.08 136.59,37.08 v136.84,37.34 | 129.48,37.08 128.4,37.08 v128.27,37.21 | R122.2 129.54,37.15 129.48,37.08 | D23.C v147.7,8.76
  Bottom 0.254: v121.6,34.35 122.75,34.35 125.6,37.21 v128.27,37.21 | v136.84,37.34 136.59,37.08 136.59,33.27 v136.91,32.96 | v145.1,34.35 145.1,34.16 144.46,33.53 144.46,18.8 146.81,16.45 146.81,9.65 v147.7,8.76
!RESET  (via drill 0.4)
  Top 0.254: IC15.18 140.59,28.51 v140.46,28.64 | IC5.12 132.65,14.99 136.21,18.54 138.24,18.54 140.78,21.08 v141.22,21.08 | D17.C v139.95,38.54
  Bottom 0.254: v141.22,21.08 140.84,21.08 140.4,21.53 140.4,28.57 v140.46,28.64 139.7,29.4 139.7,38.29 v139.95,38.54
!SET_DP
  Top 0.254: Q19.1 R93.2 | 126.15,36.03 R93.2 | R93.2 127.17,35.01 IC15.1
+3V3  (via drill 0.4)  (1 unrouted)
  Top 0.203: R8.1 101.73,4.45 R9.1
  Top 0.254: IC5.7 135.19,9.4 134.87,9.72 127.83,9.72 127.57,9.46 IC5.1 | 113.73,8.89 IC2.1 113.73,7.11 114.24,6.6 120.65,6.6 121.35,7.3 IC2.7 | R7.1 100.52,4.45 v100.71,4.51 100.9,4.45 R8.1
  Top 0.305: IC7.8 C17.1
  Top 0.406: IC5.1 126.03,8.36 C14.1 v125.09,8.76 | C16.2 89.13,4.6 | IC6.8 89.44,4.32 C16.2 | C6.1 112.33,9.53 | 113.73,8.89 113.67,8.83 113.47,8.83 112.78,9.53 C6.1 | C16.2 88.24,4.36 v88.08,4.19 | 112.2,9.36 C6.1 | v125.09,4.64 124.71,5.02 113.09,5.02 v112.33,4.25 112.14,4.06 110.43,4.06 110.11,4.38 C17.1 | C6.1 112.17,7.28 v112.52,6.92
  Bottom 0.254: v100.71,4.51 100.71,5.08
  Bottom 0.406: X1.1 60.67,3.81 87.69,3.81 v88.08,4.19 88.46,3.81 96.2,3.81 97.47,5.08 100.71,5.08 105.28,5.08 106.3,4.06 112.14,4.06 v112.33,4.25 112.52,4.45 v112.52,6.92 | v125.09,4.64 v125.09,8.76
+5V  (via drill 0.4)
  Top 0.254: C47.2 104.14,87.54 IC14.8 IC14.7 | IC5.10 135.19,12.38 135.25,12.32 | IC2.10 121.35,12.38 v121.41,12.32 | IC3.8 125.91,19.98 C8.1 | IC19.13 117.89,21.55 C60.2 | Q19.2 125.97,38.09 R93.1 126.43,37.66 126.49,37.66 | R120.2 R106.2 152.91,10.23 152.84,10.16 | 140.08,10.16 | 105.6,89.53 | Q10.B 89.6,87.19 v89.41,87 | v105.6,90.3 106.74,90.3 R89.1 | R6.1 146.18,35.94 v145.48,36.64
  Top 0.305: 1.52,60.26 1.52,19.05 7.24,13.34 R138.2 | R132.2 21.02,78.36 20,79.38 | v89.41,90.3 89.41,92.52 | v132.91,36.07 132.59,36.39 127.89,36.39 126.62,37.66 126.49,37.66
  Top 0.406: D21.C 24.52,58.24 K1.1 v22.1,55.37 | LED2.BA 1.59,70.23 1.52,70.29 | v12.26,56.64 12.26,57.72 9.72,60.26 1.52,60.26 | IC5.16 126.1,13.74 C15.2 126.07,12.41 125.98,12.32 | IC2.16 112.19,13.74 C7.2 | C47.2 104.42,87.82 105.09,87.82 105.6,88.33 105.6,89.53 v105.6,90.3 | 125.83,20 C8.1 | 125.91,19.98 125.26,19.98 124.65,19.37 v124.65,17.46 | v121.92,17.97 121.92,19.94 121.2,20.66 C59.2 119.09,20.66 C60.2 | v132.91,30.29 132.93,30.46 C46.1 133.22,29.34 133.72,29.83 IC15.9 | R139.1 140.08,10.16
  Top 0.508: 1.52,60.26 1.52,70.29 1.52,73.37 LED3.BA LED3.TA 8.08,77.23
  Top 0.61: 8.08,77.23 10.22,79.38 20,79.38 33.15,92.52 89.41,92.52 105.6,92.52 | C7.2 112.17,12.61 112.46,12.32 v121.41,12.32 v123.44,12.32 125.98,12.32 135.25,12.32 137.35,12.32 139.51,10.16 140.08,10.16 | 158.5,38.67 158.43,38.73 v145.54,38.73 142.56,38.73 140.21,36.39 133.22,36.39 v132.91,36.07 | FB3.P$2 155.98,92.24 155.07,93.15 131.06,93.15 128.02,90.11 125.98,90.11 123.57,92.52 105.6,92.52 | 105.6,92.52 v105.6,92.39
  Top 0.813: FB3.P$2 156.4,91.82 158.5,89.72 158.5,38.67 158.5,10.79 157.86,10.16 152.84,10.16 140.08,10.16
  Bottom 0.254: v145.54,38.73 145.54,36.7 v145.48,36.64
  Bottom 0.305: v89.41,87 v89.41,90.3 | v123.44,12.32 123.44,15.49 124.65,16.7 v124.65,17.46
  Bottom 0.406: v22.1,55.37 17.14,55.37 15.88,56.64 v12.26,56.64 | 121.67,17.72 v121.92,17.97 121.41,17.46 v121.41,12.32 | v132.91,30.29 v132.91,36.07 | v105.6,92.39 v105.6,90.3
+5VOUT
  Top 0.254: 134.24,89.41 134.56,89.72 R4.1 136.73,89.72 IC1.1
  Top 0.406: 134.24,89.41 133.86,89.41 C5.+
  Top 0.61: D2.C 133.68,89.59 C5.+ | D1.A 144.6,91.81 144.46,91.82
  Top 0.813: C5.+ 133.79,90.68 134.94,91.82 144.46,91.82 FB3.P$1 FB2.P$1
+6V
  Top 0.406: FB1.P$2 147.39,72.77 C2.1
  Top 0.508: 145.92,87.89 145.88,87.84 C4.1 | 144.18,87.76 C4.1 | IC1.8 143.99,87.57 C4.1
  Top 0.61: 147.57,87.63 147.83,87.63 149.14,86.32 FB1.P$2 | 147.57,87.63 146.43,87.63 C3.1 145.97,87.84 145.88,87.84 | D1.C 147.5,87.7 147.57,87.63
+VREF  (via drill 0.4)
  Top 0.254: IC19.9 115.25,22.89 115.25,23.94 114.33,24.87 113.67,24.87 C63.2 113.51,25.34 | 75.44,48.64 R79.2 75.63,48.96 | C53.2 95.54,22.35 96.9,22.35 98.3,23.75 100.39,23.75 | v100.58,30.29 99.31,30.29 96.71,32.89 94.36,32.89 93.73,32.26 85.15,32.26 v84.9,32.51 84.58,32.19 R14.1 | v71.31,53.34 71.06,53.09 65.41,53.09 64.77,53.72 64.77,61.72 65.34,62.29 66.04,62.29 | 75.63,48.96 76.26,49.59 84.58,49.59 v84.9,49.28 | v74.23,49.28 75.32,49.28 75.63,48.96 | R81.2 97.6,71.12 86.87,71.12 R87.2 86.11,70.04 87.12,69.03 v87.12,67.18 | 66.04,62.29 68.83,62.29 69.41,62.87 86.81,62.87 v87.06,62.61 | R51.1 65.98,62.35 66.04,62.29
  Top 0.305: 100.14,24.45 100.39,24.19 100.39,23.94 100.39,23.75 101.22,22.92 104.39,22.92 105.09,23.62 v108.33,23.62 | v113.6,23.62 C63.2 | 94.74,23.3 C53.2 94.93,23.65 94.93,25.91 94.23,26.61 92.77,26.61 IC17.2 | C51.+ 100.39,24.26 100.58,24.45 v100.58,27.62
  Top 0.406: 100.39,23.94 C51.+ 100.2,24.2 100.2,21.21 99.89,20.89 IC16.6
  Bottom 0.254: v84.9,49.28 84.58,48.96 84.58,32.83 v84.9,32.51 | v74.23,49.28 71.31,52.2 v71.31,53.34 | v87.12,67.18 87.12,62.67 v87.06,62.61
  Bottom 0.305: v108.33,23.62 v113.6,23.62 | v100.58,27.62 v100.58,30.29
-5VOUT
  Top 0.508: D3.A D4.C 134.33,77.99 C12.2
  Top 0.61: IC4.1 136.11,79.88 C12.2 135.09,80.64 137.67,80.64 138.88,79.44 138.88,73.62 FB5.P$1
-9V  (via drill 0.4)
  Top 0.305: R23.2 99.18,43.25 | R23.2 99.31,43.56 | R26.2 99.18,45.72 99.25,45.78 | R26.2 R23.2 | D4.A 134.3,74.04 132.52,72.26 130.68,72.26 122.81,64.39 v122.81,61.59 | v101.28,52.07 101.28,48.39 99.19,46.29 R26.2
  Top 0.406: IC4.2 v137.66,78.23 v137.67,78.23 | IC4.3 v137.66,76.96 v137.67,76.96 | IC4.7 v140.72,78.23 | IC4.6 v140.72,76.96
  Top 0.508: v134.3,76.2 D4.A
  Top 0.61: v147.64,74.99 145.67,74.99 144.46,76.2 144.46,76.87 C11.2 144.44,78.14 144.53,78.23 | 144.72,78.87 C10.2 144.53,78.68 144.53,78.23 | v143.06,78.23 144.53,78.23
  Top 0.813: FB4.P$2 148.72,67.06 v148.34,67.44 C13.1
  Bottom 0.254: v137.67,78.23 137.86,78.23
  Bottom 0.305: v101.28,52.07 101.47,52.26 106.05,52.26 110.81,57.02 119.89,57.02 122.81,59.94 v122.81,61.59
  Bottom 0.61: v147.64,74.99 147.64,68.14 v148.34,67.44
  other vias: 143.07,76.96
  pour Bottom (isolate 0.305): 133.48,81.15 143.76,81.15 143.76,76.26 140.84,76.26 140.84,74.55 133.48,74.55
AUX_IN  (via drill 0.4)
  Top 0.254: v20.38,70.48 17.91,70.48 C56.2 | IC18.1 75.03,32.35 72.2,35.18 70.04,35.18 v68.39,36.83
  Top 0.406: C56.2 17.79,70.48 14.86,70.48 | 14.86,70.48 R98.1 | ZD3.3 14.86,70.27 14.86,70.48
  Bottom 0.254: v68.39,36.83 65.34,39.88 65.34,45.66 63.88,47.12 43.18,47.12 42.16,48.13 42.16,51.44 40.01,53.59 38.42,53.59 32.19,59.82 32.19,66.61 28.32,70.48 v20.38,70.48
AUX_USET_SW  (via drill 0.4)
  Top 0.254: v126.94,32.83 127.38,32.38 130.18,32.38 130.62,32.83 R92.2 131.06,33.08 IC15.4 135.95,33.08 136.08,32.96 136.08,32.13 138.81,29.4 v138.81,26.23 | v123.06,32.83 121.86,32.83 120.52,34.16 100.78,34.16 99.5,35.43 87,35.43 86.49,34.92 84.2,34.92 83.82,35.31 82.61,35.31 81.98,34.67 80.2,34.67 78.87,33.34 78.87,32.36 IC18.6 78.96,32.35
  Bottom 0.254: LED2.TA 4.7,67.01 4.7,50.93 9.97,45.66 9.97,33.08 10.99,32.07 10.99,12.51 21.08,2.41 140.02,2.41 145.29,7.68 145.29,15.11 138.81,21.59 v138.81,26.23 | v126.94,32.83 v123.06,32.83
BIAS_IN+
  Top 0.61: FB8.P$1 151.64,87.21 X2.9
CC_ACTIVE  (via drill 0.4)
  Top 0.254: R120.1 R123.2 148.47,15.18 v148.72,15.43 | Q24.1 154.56,33.27 153.61,32.32 v149.42,32.32 144.78,32.32 143.59,31.13 IC15.22
  Bottom 0.254: v148.72,15.43 148.72,15.56 149.67,16.51 149.67,32.07 v149.42,32.32
CC_LED
  Top 0.254: R114.2 8.6,83 LED3.BC
CCS_HS  (via drill 0.4)
  Top 0.406: Q2.2 44.03,80.45
  other vias: 35.31,81.72 35.31,80.84 35.31,78.17 39.69,81.72 35.31,82.61 35.31,79.95 35.31,79.06 39.69,80.84 39.69,82.61 39.69,79.95 39.69,79.06 39.69,78.17
  pour Top (isolate 0.406, no thermals): 44.45,76.77 44.45,87.44 34.1,87.44 34.1,76.77
  pour Bottom (isolate 0.508, no thermals): 44.45,76.77 44.45,87.44 34.1,87.44 34.1,76.77
CS_ADC
  Top 0.254: IC19.2 119.19,25.27 119.44,25.02 126.62,25.02 127.81,23.83 RN1.7
CS_DAC  (via drill 0.4)
  Top 0.254: IC17.5 97.99,25.32 v98.23,25.08 | RN1.8 127.01,23.43 122.67,23.43 v121.67,22.42
  Bottom 0.254: v98.23,25.08 98.49,24.83 98.49,18.92 99.95,17.46 103.06,17.46 104.9,15.62 115.76,15.62 120.97,20.83 120.97,21.72 v121.67,22.42
CS_IOEXP
  Top 0.254: IC15.11 132.33,28.51 129.41,25.58 RN1.5
CSA
  Top 0.254: IC3.1 127.27,16.71 127.25,16.7 120.84,16.7 119.63,15.49 118.68,15.49 117.6,14.41 117.6,13.8 IC2.13
CSB
  Top 0.254: IC2.12 118.81,14.61 119.19,14.99 119.89,14.99 121.09,16.19 127.57,16.19 127.77,16.39 IC3.2
CURR_5A  (via drill 0.4, 0.4 pad 0.41)
  Top 0.254: IC15.5 130.97,32.42 130.43,31.88 126.75,31.88 122.43,36.2 101.79,36.2 100.52,37.47 85.66,37.47 v85.41,37.21 85.15,37.47 73.66,37.47 72.9,36.7 71.18,36.7 70.36,37.53 v70.36,39.88 | v68.26,46.29 68.26,46.99 67.37,47.88 66.76,47.88 Q17.E 65.64,48.96 64.39,48.96 63.06,50.29 63.06,68.64 v61.47,70.23 | v86.87,47.12 85.71,47.12 IC13.13
  Top 0.305: 81.6,86.3 Q14.1 81.54,87.25 | R48.2 81.54,87.25 | v80.58,87.19 81.47,87.19 81.54,87.25 | Q17.E 65.79,48.45 | Q11.4 61.64,77.04 v61.53,77.15
  Bottom 0.254: v70.36,39.88 70.36,44.2 v68.26,46.29 | v86.87,47.12 85.09,45.34 85.09,37.53 v85.41,37.21
  Bottom 0.305: v80.58,87.19 80.45,87.06 79.76,87.06 77.53,84.84 64.2,84.84 62.1,82.74 62.1,82.42 61.28,81.6 61.28,77.41 v61.53,77.15 61.28,76.9 61.28,72.07 61.59,71.75 61.59,70.42 61.47,70.29 v61.47,70.23
CURR_50MA  (via drill 0.4)
  Top 0.254: IC15.7 131.08,31.13 130.81,30.86 126.24,30.86 121.92,35.18 101.28,35.18 100.01,36.45 86.49,36.45 85.98,35.94 84.84,35.94 84.33,36.45 82.3,36.45 81.79,35.94 81.03,35.94 80.77,36.2 v78.49,36.2 | IC13.6 79.88,44.58 v78.87,44.58 | v60.13,71.18 61.66,71.18 63.56,69.28 63.56,53.34 64.96,51.94 78.42,51.94 v78.49,52.01
  Top 0.305: D14.C 80.8,83.92 Q14.3 79.69,84.2 78.68,85.22 Q15.3 78.61,88.33 v78.04,88.9 | Q13.4 v63.69,87.76
  Bottom 0.254: v78.49,36.2 78.49,44.51 | v78.49,52.01 78.49,44.51 | v78.87,44.58 78.55,44.58 78.49,44.51
  Bottom 0.305: v60.13,71.18 60.13,84.2 v63.69,87.76 64.83,88.9 v78.04,88.9
CURR_500MA  (via drill 0.4)
  Top 0.254: IC15.6 131.01,31.76 130.62,31.37 126.49,31.37 122.17,35.69 101.54,35.69 100.27,36.96 86.3,36.96 85.79,36.45 85.03,36.45 84.52,36.96 81.66,36.96 v81.41,36.7 81.15,36.96 73.91,36.96 73.15,36.2 70.93,36.2 66.99,40.13 66.42,40.13 65.66,40.89 Q16.E 65.66,45.34 62.55,48.45 62.55,68.01 60.52,70.04 v60.33,70.04 | v81.47,44.26 81.47,44.77 81.09,45.15 80.09,45.15 IC13.5
  Top 0.305: v79.76,87.88 79.76,90.42 Q15.1 79.76,90.55 R49.2 | 62.04,82.12 Q12.4 61.64,82.44 v61.28,82.8
  Bottom 0.254: v81.47,44.26 81.47,36.77 v81.41,36.7
  Bottom 0.305: v60.33,70.04 60.33,70.23 61.02,70.93 61.02,71.5 60.71,71.82 60.71,82.23 v61.28,82.8 62.04,83.5 63.94,85.41 77.28,85.41 v79.76,87.88
CV_ACTIVE  (via drill 0.4)
  Top 0.254: R106.1 R108.2 v154.81,15.49 | IC15.23 143.4,31.76 144.65,33.02 147.51,33.02 149.54,35.05 151,35.05 | 151,35.05 151.45,35.05 v151.51,35.12 | Q23.1 151,35.05
  Bottom 0.254: v154.81,15.49 154.81,24.45 150.75,28.51 150.75,32.58 151.76,33.59 151.76,34.86 v151.51,35.12
CV_LED
  Top 0.254: R109.1 9.18,81.03 LED3.TC
DC_BIAS  (via drill 0.4)
  Top 0.406: Q4.2 v108.9,83.06 | R19.2 93.73,78.68 94.17,79.12 v94.17,82.42 93.85,82.74 92.9,82.74 R20.2 | C21.1 119.25,80.96 119.32,81.03
  Top 0.61: C21.1 119.38,80.58 122.62,80.58 124.9,82.87 147.45,82.87 148.08,83.5 v148.08,84.71 | 119.32,81.03 116.84,81.03 | FB8.P$2 v150.5,84.71
  Bottom 0.406: v108.9,83.06 99.95,83.06 99.31,82.42 v94.17,82.42
  Bottom 0.61: v150.5,84.71 v148.08,84.71
  pour Top (isolate 0.305): 110.17,88.39 116.78,88.39 117.73,87.44 117.73,80.45 116.78,79.5 109.22,79.5 109.22,87.44
DIB_5V  (1 unrouted)
DIB_12V  (1 unrouted)
DIB_A0  (via drill 0.4)
  Top 0.203: R9.2 104.52,4.45 v104.78,4.19 104.9,4.06 107.06,4.06 107.7,4.7 107.7,5.61 IC7.7 | IC6.1 97.78,4.32 v97.92,4.19
  Top 0.254: IC6.1 95.75,4.32 v93.22,6.86
  Bottom 0.203: v104.78,4.19 101.73,4.19 101.22,3.68 98.42,3.68 v97.92,4.19
  Bottom 0.254: X1.17 74.84,9.55 76.77,7.62 90.23,7.62 90.74,7.11 92.96,7.11 v93.22,6.86
DIB_A1  (via drill 0.4)
  Top 0.203: IC6.2 98.55,5.59 98.74,5.4 100.71,5.4 R8.2 101.66,6.73 102.3,7.37 104.84,7.37 105.73,6.48 105.73,4.83 106.05,4.51 106.81,4.51 107.05,4.75 IC7.6
  Top 0.254: IC6.2 95.69,5.59 v94.3,6.99
  Bottom 0.254: X1.19 79.21,8.13 90.42,8.13 90.93,7.62 93.66,7.62 v94.3,6.99
DIB_A2  (via drill 0.4)
  Top 0.203: IC7.5 106.41,6.43 105.03,7.81 101.16,7.81 R7.2
  Top 0.254: R7.2 99.69,6.86 IC6.3 95.56,6.86 94.42,8 v94.42,8.06 | X1.18 76.1,11.24 88.08,11.24 v88.77,10.54
  Bottom 0.254: v88.77,10.54 91.19,8.13 94.36,8.13 v94.42,8.06
DIB_CSA  (via drill 0.4)
  Top 0.254: v117.54,7.37 IC2.4 | v117.54,4.13 116.84,3.43 67.18,3.43 v64.33,6.29
  Bottom 0.254: v117.54,4.13 v117.54,7.37 | v64.33,6.29 64.33,9.61 X1.9
DIB_CSB  (via drill 0.4)
  Top 0.203: IC2.5 v118.81,9.53
  Top 0.254: X1.12 67.17,12.5 65.98,11.3 65.98,9.14 66.48,8.64 68.45,8.64 70.29,6.79 71.06,6.79 71.56,7.3 87.25,7.3 88.08,8.13 89.79,8.13 91.44,9.78 96.33,9.78 v97.03,10.48
  Bottom 0.254: v118.81,9.53 116.33,9.53 115.76,10.1 110.62,10.1 109.86,9.34 108.65,9.34 108.39,9.59 97.92,9.59 v97.03,10.48
DIB_IRQ  (via drill 0.4)
  Top 0.254: v133.92,6.48 IC5.6 | v127.89,6.35 127.89,6.1 v111.44,6.1 | v73.28,5.33 75.75,5.33 v75.82,5.27
  Bottom 0.254: v133.92,6.48 133.54,6.1 128.08,6.1 v127.89,6.35 | X1.10 64.72,12.5 65.98,11.24 65.98,6.16 66.8,5.33 v73.28,5.33 | v111.44,6.1 110.49,5.14 106.81,5.14 105.79,6.16 97.03,6.16 95.82,4.95 89.15,4.95 88.58,5.52 87.5,5.52 86.87,4.89 76.2,4.89 v75.82,5.27
DIB_MISO  (via drill 0.4)
  Top 0.254: X1.14 69.71,12.5 68.52,11.3 68.52,9.27 69.47,8.32 86.81,8.32 87.69,9.21 89.34,9.21 90.93,10.79 94.68,10.79 v94.93,11.05 | v116.65,10.29 119.19,10.29 120.08,9.4 IC2.6
  Bottom 0.254: v116.65,10.29 116.33,10.6 110.36,10.6 109.6,9.84 108.84,9.84 108.58,10.1 98.55,10.1 97.35,11.3 95.25,11.3 v94.93,11.05
DIB_MOSI  (via drill 0.4)
  Top 0.254: IC5.3 130.11,6.79 128.91,5.59 112.01,5.59 v111.44,5.02
  Bottom 0.254: X1.15 72.3,7.52 75.44,4.38 87.12,4.38 87.76,5.02 88.39,5.02 88.96,4.45 96.01,4.45 97.22,5.65 105.54,5.65 106.55,4.64 111.06,4.64 v111.44,5.02
DIB_NFAULT  (via drill 0.4)
  Top 0.254: v60.2,7.11 67.31,7.11 v67.63,6.79 | IC7.3 107.05,8.84 v107.06,8.83 | v70.67,7.56 70.93,7.81 87,7.81 87.82,8.64 89.53,8.64 91.19,10.29 95.69,10.29 v95.95,10.54
  Bottom 0.254: v60.2,7.11 59.91,7.11 X1.3 | 67.88,7.05 v67.63,6.79 68.39,7.56 v70.67,7.56 | v95.95,10.54 95.95,10.41 97.28,9.08 106.81,9.08 v107.06,8.83
DIB_NRESET
  Top 0.254: IC5.5 132.65,7.68 127.32,2.35 62.29,2.35 55.82,8.83 55.82,11.26 X1.4
DIB_SCL
  Top 0.203: 107.82,9.78 107.71,9.89 IC7.2 107.7,10.01 107.7,10.79 107.44,11.05 106.05,11.05 103.82,8.83 93.98,8.83 92.02,6.86 IC6.6
  Top 0.254: IC6.6 91.22,7.05 88.46,7.05 87.69,6.29 72.01,6.29 71.5,5.78 69.79,5.78 67.94,7.62 61.94,7.62 X1.5
DIB_SCLK  (via drill 0.4)
  Top 0.254: IC2.3 116.27,9.59 115.44,10.41 109.41,10.41 v109.22,10.6 | X1.13 70.24,9.96 71.37,8.83 86.55,8.83 87.44,9.72 89.09,9.72 90.68,11.3 93.66,11.3 v94.17,11.81
  Bottom 0.254: v109.22,10.6 98.74,10.6 97.54,11.81 v94.17,11.81
DIB_SDA
  Top 0.203: IC7.1 108.34,10.91 107.76,11.49 105.86,11.49 103.63,9.27 93.79,9.27 92.65,8.13 IC6.5
  Top 0.254: IC6.5 91.35,8.19 90.81,8.19 90.23,7.62 88.33,7.62 87.5,6.79 71.82,6.79 71.31,6.29 70.04,6.29 68.2,8.13 64.39,8.13 63.37,9.14 63.37,11.3 62.18,12.5 X1.8
DP_LED  (via drill 0.4)
  Top 0.254: v104.46,39.69 103.12,39.69 101.22,41.59 R95.2 | v107.57,39.69 117.73,39.69 120.71,42.67 v121.67,42.67 | v121.67,37.72 121.67,37.2 Q19.3
  Bottom 0.254: v104.46,39.69 v107.57,39.69 | v121.67,42.67 v121.67,37.72
DP_S
  Top 0.305: R12.1 110.94,41.73 R15.1 R16.1
  Top 1.27: 110.98,49.56 R11.1 111.08,49.54 Q5.3
  pour Top (isolate 0.305): 111.7,50.93 107.25,50.93 107.25,43.94 111.7,43.94
GCOM  (via drill 0.4)
  Top 0.254: IC9.6 81.97,24.64 v81.22,25.4 | R24.1 70.93,26.42 v71.94,25.4
  Top 0.305: IC9.6 IC9.7
  Bottom 0.254: v71.94,25.4 v81.22,25.4
GND  (via drill 0.4)